# Altium PCB PCB8.PcbDoc
Units mil, origin at the board's own origin, x right, y up, seen from the top; angles counter-clockwise.
Board outline 5200 x 4000 mil, 2 copper layers (Top Layer, Bottom Layer); 22 components, 28 nets, 111 pads, 14 vias.
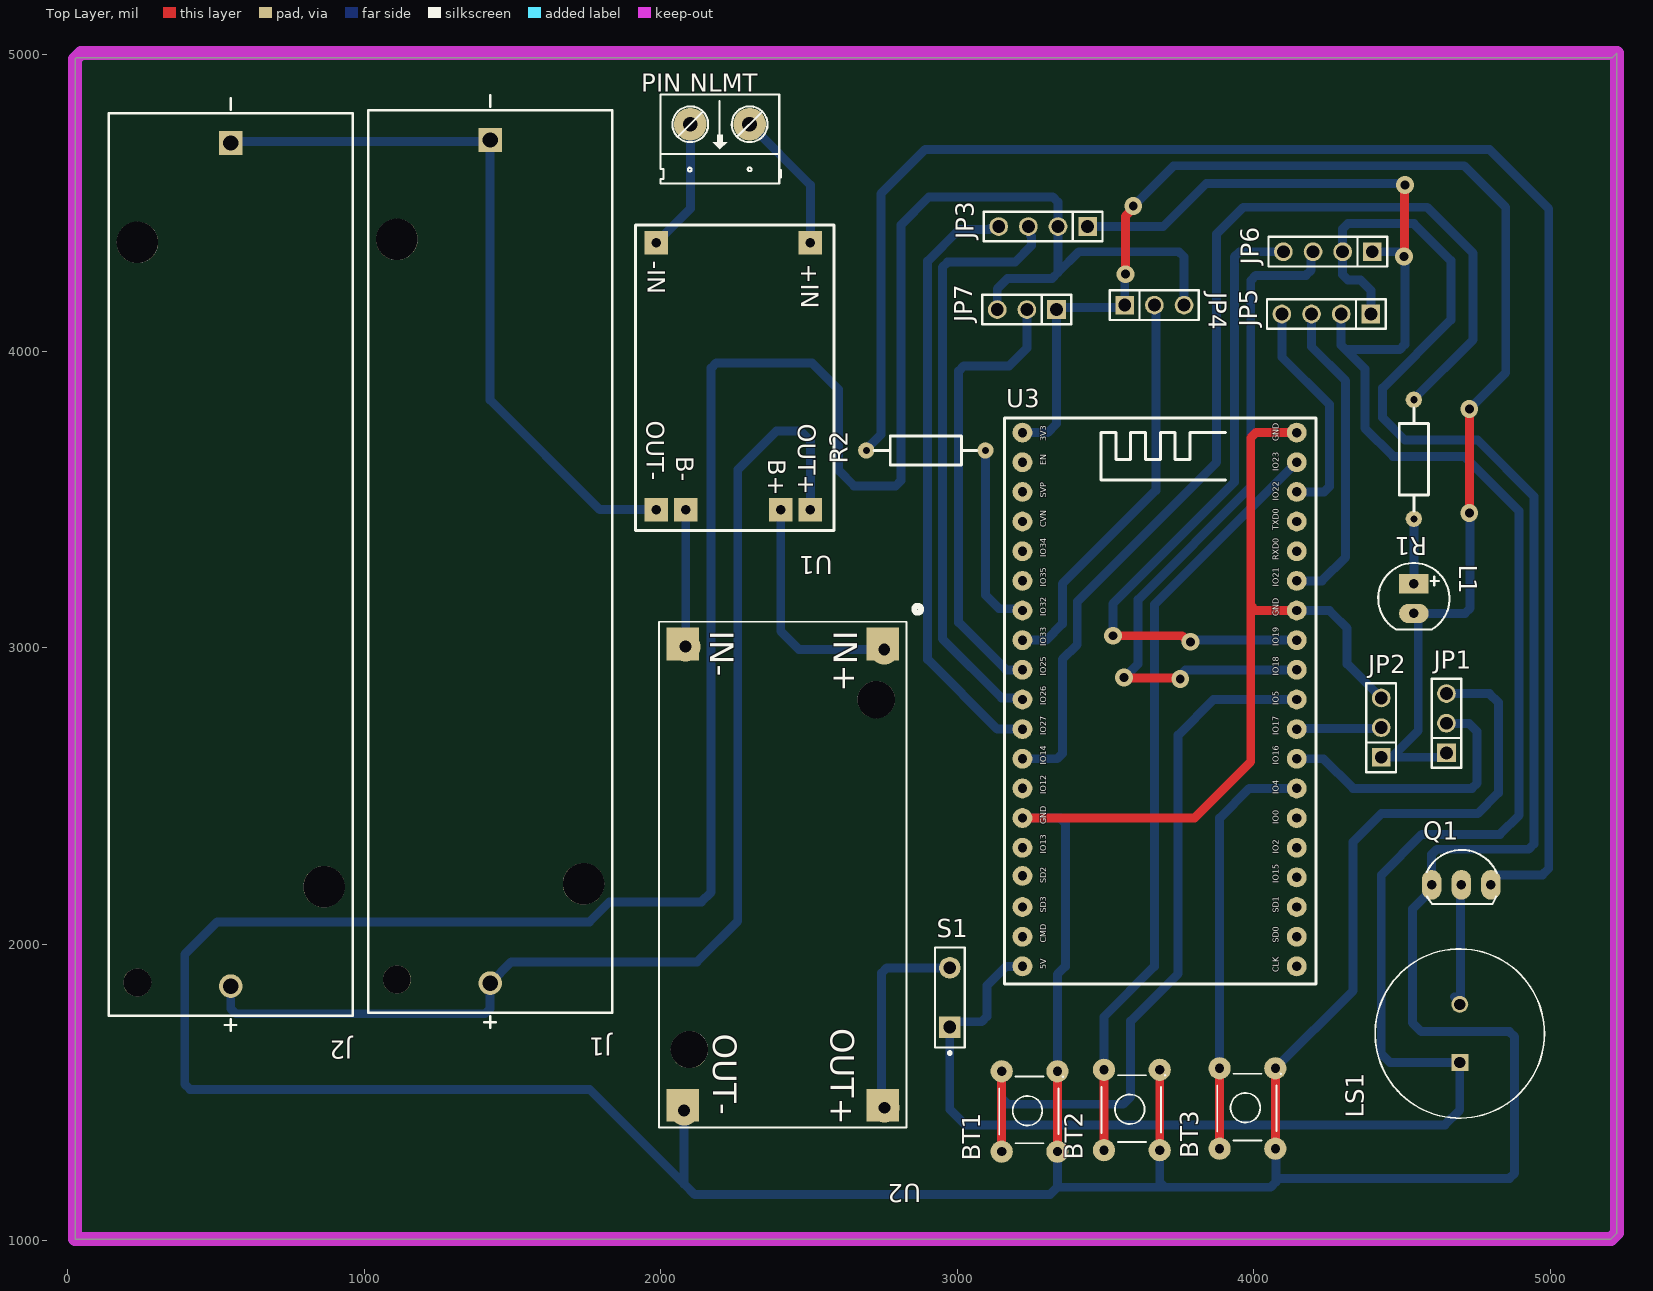
[diagram p0: Top Layer view]
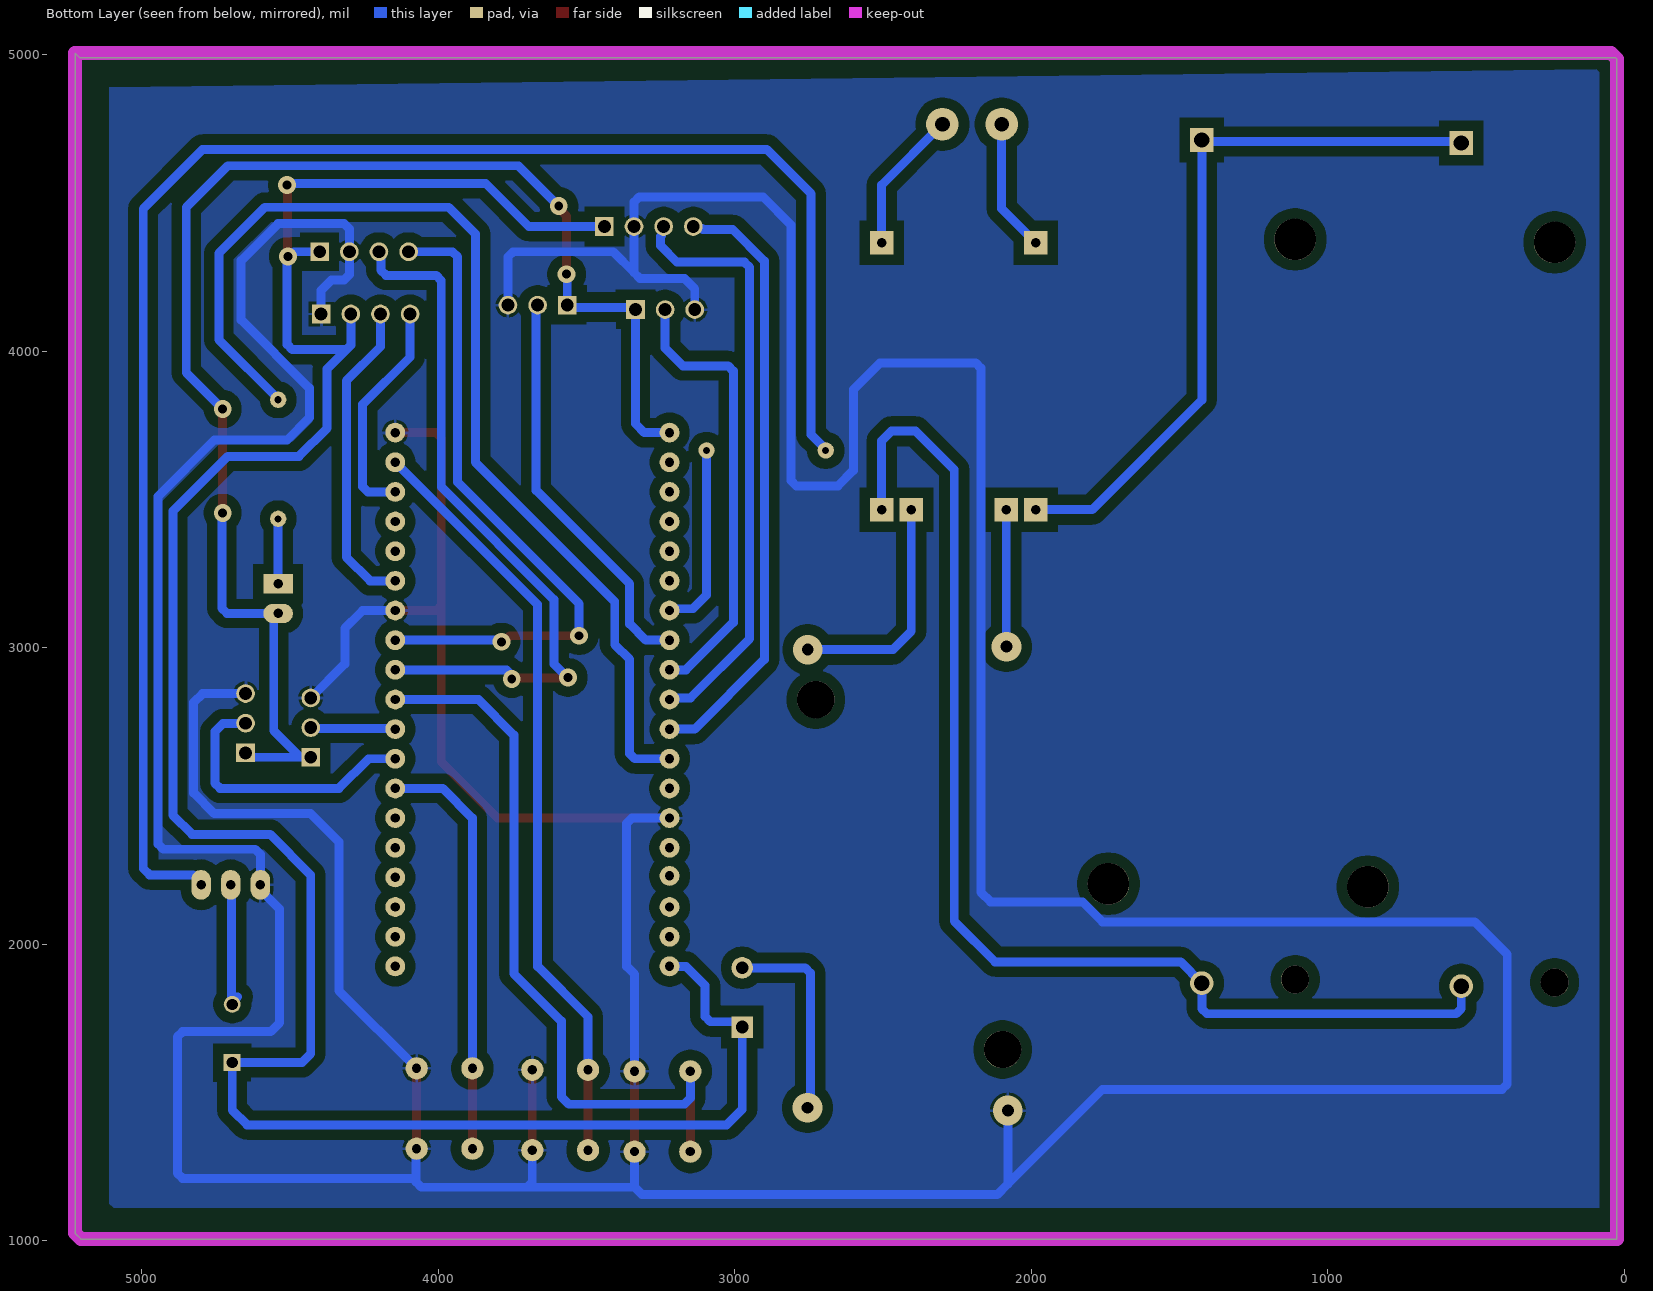
[diagram p1: Bottom Layer view, seen from below]
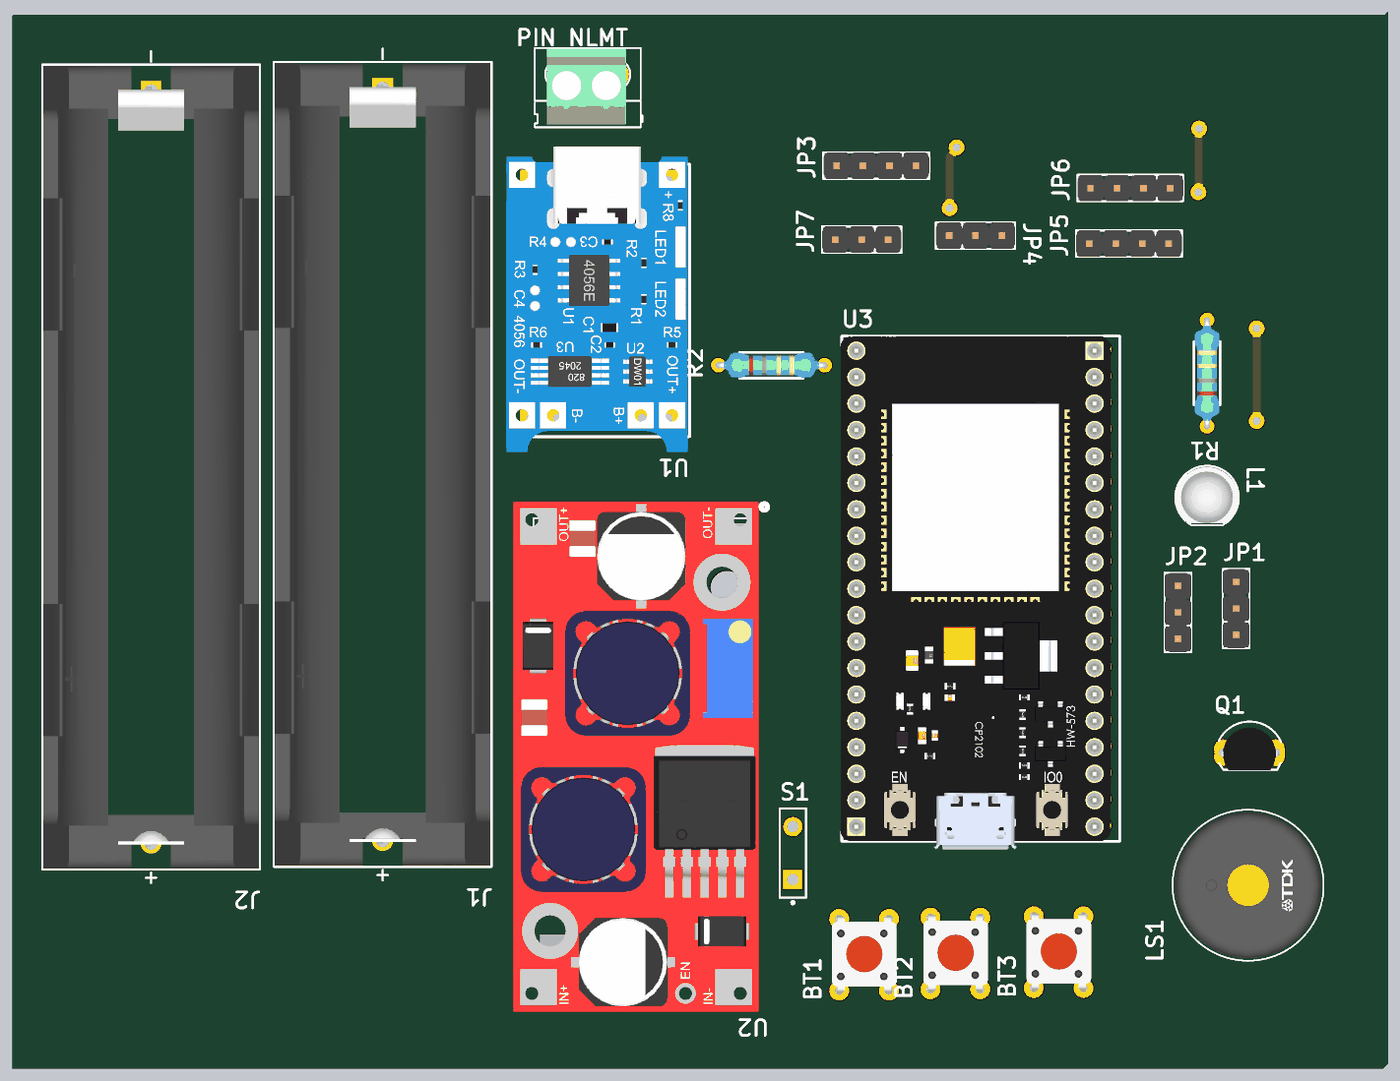
[diagram p2: 3D render of the assembled board from above, using the file's embedded part models]

## Layer stack, top to bottom
Top Solder: solder mask 0.4, Solder Resist, Dk 3.5
Top Layer: signal copper 1.4
Dielectric 1: dielectric 12.6, FR-4, Dk 4.8
Bottom Layer: signal copper 1.4
Bottom Solder: solder mask 0.4, Solder Resist, Dk 3.5

## Board outline
25,1005 25,4985 30,4990 5210,4990 5225,5005 5225,1025 5205,1005

## Design rules (kind name [scope] priority, off if disabled: settings)
Clearance [All] p1: gap=20 ignorepadtopadclearanceinfootprint=FALSE
PolygonConnect [All] p1: connectstyle=Relief reliefconductorwidth=10 reliefentries=4 polygonreliefangle="90 Angle" airgapwidth=10
RoutingVias [All] p1: holewidth=28 width=50 viastyle="Through Hole" minholewidth=28 minwidth=50 maxholewidth=28 maxwidth=50
SolderMaskExpansion [All] p1: expansion=4 istentingtop=FALSE
Width [All] p1: maxlimit=50 minlimit=10 preferedwidth=30 minimp=50.000000 maximp=50.000000 favimp=50.000000
30 further rules are at their usual default settings.

## Components (designator, comment, footprint, x,y, rotation, side; value= is the part's Value field where it differs from the comment)
BT1 "Nut Nhan 4 Chan Cam 6x6" "Nut Nhan 4 Chan Cam 6x6" 3142,1313 r90 top
BT2 "Nut Nhan 4 Chan Cam 6x6" "Nut Nhan 4 Chan Cam 6x6" 3487,1318 r90 top
BT3 "Nut Nhan 4 Chan Cam 6x6" "Nut Nhan 4 Chan Cam 6x6" 3877,1323 r90 top
J1 "1043P" FP-1043P-MFG 1425,3290 r270 top
J2 "1043P" FP-1043P-MFG 550,3280 r270 top
JP1 "DHT11" "JP 1x3 DT" 4650,2645 r90 top
JP2 "DHT11" "JP 1x3 DT" 4430,2630 r90 top
JP3 "MQ6" "JP 1x4 DT" 3440,4420 r180 top
JP4 "LM393" "JP 1x3 DT" 3565,4155 r0 top
JP5 "LCD_I2C" "JP 1x4 DT" 4395,4125 r180 top
JP6 "MQ6" "JP 1x4 DT" 4400,4335 r180 top
JP7 "LM393" "JP 1x3 DT" 3335,4140 r180 top
L1 "LED 5mm" LED-5MM-RED 4540,3215 r270 top
LS1 "PS1440P02BT" FP-PS1440P02BT-MFG 4695,1698.43 r90 top
"PIN NLMT" "CON 2 KF301" "Con 2 KF301 5.08" 2300,4765 r180 top
Q1 "C1815" TO92 4700,2200 r0 top value=C9014
R1 "220R" "tro vach 1/4w" 4540,3635 r270 top
R2 "1k" "tro vach 1/4w" 2894.21,3665 r180 top
S1 "SW-SPST" SPST-2 2975,1820 r90 top
U1 "TP4056 MODULE66" TP4056MODULE 2250,3910 r270 top
U2 "XL6009模块" XFMR-SMD_XL6009 2435,2260 r270 top
U3 "ESP-32s" ESP-32S 3685,2820 r0 top

## Footprints (in the part's own frame and the unit in brackets; to place one, negate y for a bottom-side part, rotate by r counter-clockwise, add the part's x,y. Pads: shape width x height; smd on the part's side, far side on the other; paste and mask are expansions set on the pad)
"Con 2 KF301 5.08" [mil]
  round 110 hole 50: 1(0,0) 2(200,0)
  silkscreen extent -106,-100 300,200, body extent -45,-97 255,190, height 335
ESP-32S [mm]
  round 1.7 hole 0.8 paste+0 mask+0.102: 1(-11.811,22.987) 2(-11.811,20.447) 3(-11.811,17.907) 4(-11.811,15.367) 5(-11.811,12.827) 6(-11.811,10.287) 7(-11.811,7.747) 8(-11.811,5.207) 9(-11.811,2.667) 10(-11.811,0.127) 11(-11.811,-2.413) 12(-11.811,-4.953) 13(-11.811,-7.493) 14(-11.811,-10.033) 15(-11.811,-12.573) 16(-11.811,-14.986) 17(-11.811,-17.653) 18(-11.811,-20.193) 19(-11.811,-22.733) 20(11.684,-22.733) 21(11.684,-20.193) 22(11.684,-17.653) 23(11.684,-15.113) 24(11.684,-12.573) 25(11.684,-10.033) 26(11.684,-7.493) 27(11.684,-4.953) 28(11.684,-2.413) 29(11.684,0.127) 30(11.684,2.667) 31(11.684,5.207) 32(11.684,7.747) 33(11.684,10.287) 34(11.684,12.827) 35(11.684,15.367) 36(11.684,17.907) 37(11.684,20.447) 38(11.684,22.987)
  silkscreen extent -13.33,-24.26 13.33,24.26, body extent -13.46,-25.06 12.45,24.26, height 4.73
FP-1043P-MFG [mm]
  rect 2.02x2.02 hole 1.32 paste-1000 mask+0: 1(-36.11,0)
  round 2.02 hole 1.32 paste-1000 mask+0: 2(36.11,0)
  round 3.55 hole 3.55 unplated paste-1000 mask+0: ""(-27.6,-8) ""(27.6,8)
  round 2.39 hole 2.39 unplated paste-1000 mask+0: ""(35.8,-8)
  silkscreen extent -39.95,-10.45 39.95,10.45, body extent -38.75,-10.55 38.75,10.55, height 0.25
FP-PS1440P02BT-MFG [mm]
  rect 1.45x1.45 hole 0.95 paste-1000 mask+0: 1(-2.5,0)
  round 1.45 hole 0.95 paste-1000 mask+0: 2(2.5,0)
  silkscreen extent -7.25,-7.25 7.25,7.25, body extent -7.35,-7.35 7.35,7.35, height 0.25
"JP 1x3 DT" [mm]
  rect 1.6x1.6 hole 1.1: 1(0,0)
  round 1.6 hole 1.1: 2(2.54,0) 3(5.08,0)
  silkscreen extent -1.27,-1.27 6.35,1.27, body extent -1.27,-1.27 6.35,1.27, height 8.54
"JP 1x4 DT" [mm] "4 pins, 1 row, straight, gold plating"
  rect 1.6x1.6 hole 1.1: 1(0,0)
  round 1.6 hole 1.1: 2(2.54,0) 3(5.08,0) 4(7.62,0)
  silkscreen extent -1.27,-1.27 8.89,1.27, body extent -1.27,-1.27 8.89,1.27, height 8.54
LED-5MM-RED [mil] "LED 2 PIN, 5 ly , Only colour,pin to pin 100mil"
  rect 65x100 hole 32: 1(0,0)
  oval 65x100 hole 32: 2(100,0)
  silkscreen extent -70,-120 154,120, body extent -65,-119 149,118, height 339
"Nut Nhan 4 Chan Cam 6x6" [mil] "SW button 4pin, 250 x250 mil"
  round 75 hole 31: 1(-13,-8) 1(258,-8) 2(-13,-196) 2(258,-196)
  silkscreen extent 15,-215 240,0, body extent -31,-225 281,19, height 276
SPST-2 [mm] "Switch; 2 Leads"
  rect 1.85x1.85 hole 1.1: 1(-2.54,0)
  round 1.85 hole 1.1: 2(2.54,0)
  silkscreen extent -4.89,-1.27 4.28,1.27
TO92 [mil] "TO-92"
  oval 66x100 hole 32: 1(-100,0) 2(0,0) 3(100,0)
  silkscreen extent -117,-65 120,118, body extent -109,-66 109,95, height 245
TP4056MODULE [mm]
  rect 2x2 hole 0.8 paste+0 mask+0.051: 1(-11.557,6.477) 2(-11.557,-6.731) 3(11.303,3.937) 4(11.303,-4.191) 5(11.303,6.477) 6(11.303,-6.731)
  silkscreen extent -13.08,-8.51 13.08,8.51, body extent -14.77,-9.08 14.53,8.32, height 4.14
"tro vach 1/4w" [mm]
  round 1.4 hole 0.6: 1(-5.1,0) 2(5.1,0)
  silkscreen extent -4.39,-1.25 4.42,1.25, body extent -5.38,-1.2 5.38,1.2, height 2.41
XFMR-SMD_XL6009 [mm]
  rect 2.8x2.8 smd paste+0 mask+0.05: 1(-19.098,7.985) 2(20.4,7.985) 3(20.4,-9.161) 4(-19.098,-9.161)
  round 3.2 hole 3.2 unplated paste-2539.97: ""(-14.335,7.413) ""(15.637,-8.589)
  silkscreen extent -22.38,-11.19 22.31,11.27, body extent -22.59,-13.09 26.4,10.41, height 12.83

## Part data
BT1 BT2 BT3: "Nut Nhan 4 Chan 6x6mm", Ma_Hang=MH004584, Ten="Nút Nhấn 4 Chân 6x6x5MM DIP"
J1 J2: library part CMP-19636-000034-1, "BATT HOLDER 18650 1 CELL PC PIN", Max Operating Temperature=145°C, Min Operating Temperature=-50°C, Package Quantity=50, Mount="Through Hole", Number of Cells=1, Packaging=Tray, Series=-, Termination="PC Pin"
JP1 JP2 JP4 JP7: library part "JP 1x3 2.54 Duc Thang", "Cắm", Chung_Loai=Cắm, Don_Vi=Con, Ma_Hang=MH000903, Ten_Linh_Kien="Jump Đơn Đực 2.54MM 1x40P Thẳng 11MM"
JP3 JP5 JP6: library part "JP 1x4 2.54 Duc Thang", "Cắm", Chung_Loai=Cắm, Don_Vi=Con, Ma_Hang=MH000903, Ten_Linh_Kien="Jump Đơn Đực 2.54MM 1x40P Thẳng 11MM"
L1: library part "LED 5mm Do", "Cắm", Chung_Loai=Cắm, Don_Vi=Con, Ma_Hang=MH008967, Ten_Linh_Kien="Led 5MM Phủ Đỏ (1000c)"
LS1: library part CMP-08413-000003-1, "AUDIO PIEZO TRANSDUCER 30V TH", Frequency=4kHz, Max Operating Temperature=70°C, Min Operating Temperature=-10°C, Operating Supply Voltage=3V, Package Quantity=350, Diameter=14mm, Height=8mm, Lead Free="Lead Free", Mount="Through Hole", Number of Terminals/Pins=2, Packaging="Tape and Reel", RoHS Compliant=Yes, Self Resonant Frequency=4kHz, Termination="PC Pins", Voltage Rating (DC)=3V, Washable=No
"PIN NLMT": "Cắm", Chung_Loai=Cắm, Don_Vi=Con, Ma_Hang=MH000987, Ten_Linh_Kien="CON 2 KF301-2P 5.08MM Xanh Dương"
Q1: "NPN transistor"
R1: library part "Tro Vach 1/4W 5% 220R", "Cắm", Chung_Loai=Cắm, Don_Vi=Con, Ma_Hang=MH007300, So_Chan=2, Ten_Linh_Kien="Trở Vạch 1/4w 5% 220R"
R2: library part "Tro Vach 1/4W 5% 1k", "Cắm", Chung_Loai=Cắm, Don_Vi=Con, Ma_Hang=MH007390, So_Chan=2, Ten_Linh_Kien="Trở Vạch 1/4w 5% 1k"
S1: "Single-Pole, Single-Throw Switch", LatestRevisionDate=17-Jul-2002, LatestRevisionNote="Re-released for DXP Platform.", PackageDescription="Switch; 2 Leads", PackageReference=SPST-2, Published=24-Mar-1999, Publisher="Altium Limited"

## Via types
v1: diameter 60, hole 30, Top Layer to Bottom Layer, 10 vias
v2: diameter 100, hole 40, Top Layer to Bottom Layer, 4 vias

## Nets (pads, with @x,y where several pads share a name; then routed paths per layer and width w, separated by ;. In a path a pad name is that pad's centre, name@x,y a point inside that pad or via, vN(x,y) a via of type N, cw(c..) or ccw(c..) an arc to the next point about the centre after c; other vN are vias at no path point)
+4V2: J1.2 J2.2 U1.5 | length 4040
  Bottom Layer w30: J2.2 550,1782.57 567.57,1765 1407.43,1765 1425,1782.57 J1.2 1496.65,1940 2122.43,1940 2260,2077.57 2260,3600 2390,3730 2472.43,3730 2505,3697.43 U1.5
+5V: JP3.1 JP5.2 JP6.1 LS1.1 S1.1 U3.19 | length 8084.3
  Top Layer w30: v1(4507.25,4319.33) 4508.63,4320.71 4508.63,4558.63 v1(4510,4560)
  Bottom Layer w30: U3.19 3165,1925 3100,1860 3100,1755.81 3082.43,1738.24 2993.24,1738.24 S1.1 2975,1442.57 3027.57,1390 4645,1390 4695,1440 LS1.1 4460,1600 4430,1630 4430,2232.65 4567.35,2370 4830,2370 4895,2435 4895,3460 4710,3645 4470,3645 4375,3740 4375,3940 4295,4020 JP5.2 ; JP3.1 3695,4420 3840,4565 4505,4565 v1(4510,4560) ; 4315,4005 4492.43,4005 4510,4022.57 4510,4312.43 4487.43,4335 JP6.1
A0: JP6.4 U3.31 | length 2225.3
  Top Layer w30: v1(3525,3040) 3758.47,3040 3779.14,3019.33 v1(3787.25,3019.33)
  Bottom Layer w30: v1(3525,3040) 3525,3147.5 3935,3557.5 3935,4317.43 3952.57,4335 JP6.4 ; v1@3810,3025 U3.31
A1: JP3.4 U3.11 | length 2040.4
  Bottom Layer w30: JP3.4@3134.13,4413.69 3110.36,4413.69 3106.67,4410 3006.86,4410 2900,4303.14 2900,2960 3135,2725 U3.11
BGND: J1.1 J2.1 U1.6 | length 2469.1
  Bottom Layer w30: J2.1 555,4706.65 1420,4706.65 J1.1 1425,3835 1795,3465 U1.6
BT1: BT1.1 U3.29 | length 2551.6
  Top Layer w30: BT1.1@3150,1300 BT1.1@3150,1571
  Bottom Layer w30: BT1.1@3150,1571 3150,1480 3170,1460 3560,1460 3585,1485 3585,1740 3745,1900 3745,2705 3865,2825 U3.29
BT2: BT2.1 U3.37 | length 2589.2
  Top Layer w30: BT2.1@3495,1305 BT2.1@3495,1576
  Bottom Layer w30: BT2.1@3495,1576 3495,1755 3665,1925 3665,3145 U3.37
BT3: BT3.1 U3.26 | length 1416.4
  Top Layer w30: BT3.1@3885,1310 BT3.1@3885,1581
  Bottom Layer w30: BT3.1@3885,1581 3885,2425 3985,2525 U3.26
BUZZER: R2.1 U3.7 | length 634.2
  Bottom Layer w30: R2.1 3095,3177.57 3141.54,3131.04 3213.96,3131.04 U3.7
D0: JP6.3 U3.30 | length 2378
  Top Layer w30: v1(3562.25,2899.33) 3564.75,2896.83 3749.75,2896.83 v1(3752.25,2894.33)
  Bottom Layer w30: v1@3575,2910 3610,2945 3610,3161.79 3990,3541.79 3990,4237.43 4007.57,4255 4176.11,4255 4193.69,4272.57 4193.69,4328.69 JP6.3 ; v1@3750,2905 3770,2925 U3.30
D1: JP3.3 U3.10 | length 2006.5
  Bottom Layer w30: U3.10 3214.52,2830.48 3149.52,2830.48 2950,3030 2950,4282.43 2967.57,4300 3195,4300 3250,4355 3250,4386.67 3246.31,4390.36 3246.31,4413.69 JP3.3
D2: JP7.2 U3.9 | length 1520.8
  Bottom Layer w30: U3.9 3165,2925 3005,3085 3005,3932.43 3022.57,3950 3175,3950 3235,4010 JP7.2
D3: JP4.2 U3.8 | length 1362.3
  Bottom Layer w30: U3.8 3300,3025 3355,3080 3355,3215 3670,3530 JP4.2@3670,4154.05
DHT1: JP1.2 U3.27 | length 946.5
  Bottom Layer w30: U3.27 4235,2625 4335,2525 4736.01,2525 4753.58,2542.57 4753.58,2716.42 4739.99,2730.01 4726.5,2743.5 4651.5,2743.5 JP1.2
DHT2: JP2.2 U3.28 | length 287.1
  Bottom Layer w30: U3.28 4147.5,2727.5 4427.5,2727.5 JP2.2
GND: BT1.2 BT2.2 BT3.2 JP1.3 JP2.3 JP3.2 JP4.3 JP5.1 JP6.2 JP7.3 Q1.1 U2.3 U3.14 U3.32 U3.38 | length 24393.7
  Top Layer w30: U3.14 3800,2425 3990,2615 3990,3142.57 ; BT1.2@3338,1300 BT1.2@3338,1571 ; BT2.2@3683,1305 BT2.2@3683,1576 ; BT3.2@4073,1310 BT3.2@4073,1581 ; U3.32 4007.57,3125 3990,3142.57 ; U3.38 4007.57,3725 3990,3707.43 3990,3142.57
  Bottom Layer w30: v2(2079.07,1438.71) 2079.07,1190.93 ; JP7.3 3135,4210 3170,4245 3320,4245 3340,4265 ; U3.14 3347.43,2425 3365,2407.43 3365,1925 3338,1898 BT1.2@3338,1571 ; BT1.2@3338,1300 3338,1180.57 3337.43,1180 ; BT2.2@3683,1305 3683,1197.57 3700.57,1180 ; JP4.3 3765,4317.43 3747.43,4335 3410,4335 3340,4265 ; BT3.2@4073,1310 4075,1308 4075,1197.57 ; BT3.2@4073,1581 4335,1843 4335,2345 4430,2440 4755,2440 4825,2510 4825,2815 4795,2845 JP1.3 JP1.3@4650,2853.93 ; U3.32 4255,3125 4264.99,3115.01 4315,3065 4315,2945 JP2.3 ; JP5.1 4395,4205 4360,4240 4317.57,4240 4300,4257.57 JP6.2 4300,4412.43 4317.57,4430 4540,4430 4665,4305 4665,4105 4435,3875 4435,3775 4510,3700 4755,3700 4945,3510 4945,2337.57 4927.43,2320 4617.57,2320 4600,2302.43 Q1.1 4600,2183 4535,2118 4535,1735 4565,1705 4862.43,1705 4880,1687.43 4880,1227.57 4862.43,1210 4087.43,1210 4075,1197.57 ; 2079.07,1190.93 2115,1155 3312.43,1155 3337.43,1180 ; 2079.07,1190.93 1760,1510 412.57,1510 395,1527.57 395,1965 505,2075 1759.9,2075 1827.33,2142.43 2137.43,2142.43 2170,2175 2170,3942.43 2187.57,3960 2510,3960 2600,3870 2600,3597.57 2652.57,3545 2792.43,3545 2810,3562.57 2810,4425 2905,4520 3322.43,4520 3340,4502.43 JP3.2 3340,4265 ; 3337.43,1180 3700.57,1180 ; 3700.57,1180 4057.43,1180 4075,1197.57
LED: R1.1 U3.12 | length 3653.6
  Bottom Layer w30: U3.12 3337.43,2625 3355,2642.57 3355,2960 3405,3010 3405,3155 3875,3625 3875,4395 3965,4485 4585,4485 4740,4330 4740,4038.4 4540,3838.4 R1.1
NetL1_1: L1.1 R1.2 | length 219.2
  Bottom Layer w30: L1.1 R1.2
NetLS1_2: LS1.2 Q1.2 | length 438.2
  Bottom Layer w30: 4676.89,1822.29 4695,1804.18 LS1.2 4697.5,1799.35 4697.5,2197.5 Q1.2
"NetPIN NLMT_1": "PIN NLMT.1" U1.1 | length 484.9
  Bottom Layer w30: 2300,4765 2505,4560 U1.1
"NetPIN NLMT_2": "PIN NLMT.2" U1.2 | length 447.6
  Bottom Layer w30: U1.2 2100,4480 2100,4765
NetQ1_3: Q1.3 R2.2 | length 5729.8
  Bottom Layer w30: R2.2 2693.43,3668.66 2742.9,3718.14 2742.9,4530.33 2892.57,4680 4795,4680 4995,4480 4995,2255 4973.65,2233.65 4826.4,2233.65 4800,2207.26 Q1.3
NetS1_2: S1.2 U2.2 | length 695.5
  Bottom Layer w30: v2(2754.61,1448.22) 2745,1457.84 2745,1902.43 2762.57,1920 S1.2
NetU1_3: U1.3 U2.1 | length 784.5
  Bottom Layer w30: U1.3 2405,3055 2466.94,2993.06 v2(2753.89,2993.06)
NetU1_4: U1.4 U2.4 | length 462.4
  Bottom Layer w30: v2(2083.89,3003.06) 2084.44,3003.62 2084.44,3464.44 U1.4
SCL: JP5.4 U3.36 | length 766
  Bottom Layer w30: JP5.4 4095,3980 4255,3820 4255,3542.57 4237.43,3525 U3.36
SDA: JP5.3 U3.33 | length 1065.8
  Bottom Layer w30: U3.33 4230,3225 4310,3305 4310,3900 4195,4015 JP5.3
VCC: JP1.1 JP2.1 JP4.1 JP7.1 L1.2 U3.1 | length 4805.2
  Top Layer w30: v1(3567.25,4259.33) 3567.25,4454.23 3593.82,4480.8 v1(3593.82,4488.91) ; v1(4727.25,3454.33) 4727.25,3787.25 v1@4735,3795
  Bottom Layer w30: U3.1 3305,3725 3335,3755 JP7.1 3342.5,4147.5 JP4.1@3565,4147.5 ; JP4.1 v1@3565,4255 ; v1(3593.82,4488.91) 3729.9,4625 4710,4625 4850,4485 4850,3927.08 v1(4727.25,3804.33) ; JP2.1 4465,2630 ; L1.2 L1.2@4555,3115 ; JP1.1 4635,2630 4465,2630 ; v1@4730,3460 4730,3132.57 4712.43,3115 L1.2@4555,3115 ; 4465,2630 4555,2720 L1.2@4555,3115
pads on no net: J1. J2. U2. U3.2 U3.3 U3.4 U3.5 U3.6 U3.13 U3.15 U3.16 U3.17 U3.18 U3.20 U3.21 U3.22 U3.23 U3.24 U3.25 U3.34 U3.35

## Polygon pours and split planes (outlines as drawn)
GND on Bottom Layer "GND_L02_P000" (solid, pour order 0): 95,4950 85,4940 85,1110 5095,1110 5110,1125 5110,4890

## Keep-outs
Bottom Layer:
  the board outline again, w10
Keep-Out Layer:
  lines w47.24: 25,1005 5205,1005 5225,1025 5225,5005 45,5005 25,4985 25,1005

## Text inside footprints (layer, text, board x,y; h text height)
U1: Top Overlay "+IN" at 2473.27,4295 h59.05 r270; Top Overlay "-IN" at 1955.57,4305.1 h59.05 r270; Top Overlay "OUT+" at 2463.27,3755 h59.05 r270; Top Overlay "B+" at 2363.27,3635 h59.05 r270; Top Overlay "B-" at 2053.27,3645 h59.05 r270; Top Overlay "OUT-" at 1953.27,3765 h59.05 r270
U2: Top Overlay "IN+" at 2583,3057 h80 r270; Top Overlay "IN-" at 2168,3057 h80 r270; Top Overlay "OUT+" at 2573,1717 h80 r270; Top Overlay "OUT-" at 2178,1697 h80 r270
U3: Top Overlay "3V3" at 3299.84,3695 h19.68 r90; Top Overlay "EN" at 3299.84,3615 h19.68 r90; Top Overlay "SVP" at 3299.74,3504.9 h19.68 r90; Top Overlay "CVN" at 3299.84,3405 h19.68 r90; Top Overlay "IO34" at 3299.84,3305 h19.68 r90; Top Overlay "IO35" at 3299.84,3205 h19.68 r90; Top Overlay "IO32" at 3299.84,3105 h19.68 r90; Top Overlay "IO33" at 3299.84,3005 h19.68 r90; Top Overlay "IO25" at 3299.84,2905 h19.68 r90; Top Overlay "IO26" at 3299.84,2805 h19.68 r90; Top Overlay "IO27" at 3299.84,2705 h19.68 r90; Top Overlay "IO14" at 3299.84,2605 h19.68 r90; Top Overlay "IO12" at 3299.74,2504.9 h19.68 r90; Top Overlay "GND" at 3299.84,2405 h19.68 r90; Top Overlay "IO13" at 3299.84,2305 h19.68 r90; Top Overlay "SD2" at 3299.84,2205 h19.68 r90; Top Overlay "SD3" at 3299.84,2105 h19.68 r90; Top Overlay "CMD" at 3299.84,2005 h19.68 r90; Top Overlay "5V" at 3299.84,1915 h19.68 r90; Top Overlay "IO0" at 4084.84,2405 h19.68 r90; Top Overlay "GND" at 4084.84,3695 h19.68 r90; Top Overlay "IO23" at 4084.84,3595 h19.68 r90; Top Overlay "IO22" at 4084.84,3495 h19.68 r90; Top Overlay "TXD0" at 4084.84,3395 h19.68 r90; Top Overlay "RXD0" at 4084.84,3295 h19.68 r90; Top Overlay "IO21" at 4084.84,3205 h19.68 r90; Top Overlay "GND" at 4084.84,3105 h19.68 r90; Top Overlay "IO19" at 4084.84,3005 h19.68 r90; Top Overlay "IO18" at 4084.84,2905 h19.68 r90; Top Overlay "IO5" at 4084.84,2805 h19.68 r90; Top Overlay "IO17" at 4084.84,2705 h19.68 r90; Top Overlay "IO16" at 4084.84,2605 h19.68 r90; Top Overlay "IO4" at 4084.84,2505 h19.68 r90; Top Overlay "IO2" at 4084.84,2305 h19.68 r90; Top Overlay "IO15" at 4084.84,2205 h19.68 r90; Top Overlay "SD1" at 4084.84,2105 h19.68 r90; Top Overlay "SD0" at 4084.84,2005 h19.68 r90; Top Overlay "CLK" at 4084.84,1905 h19.68 r90